# EAGLE board ECE 411 Chronograph Schematic (EAGLE 9.5.1)
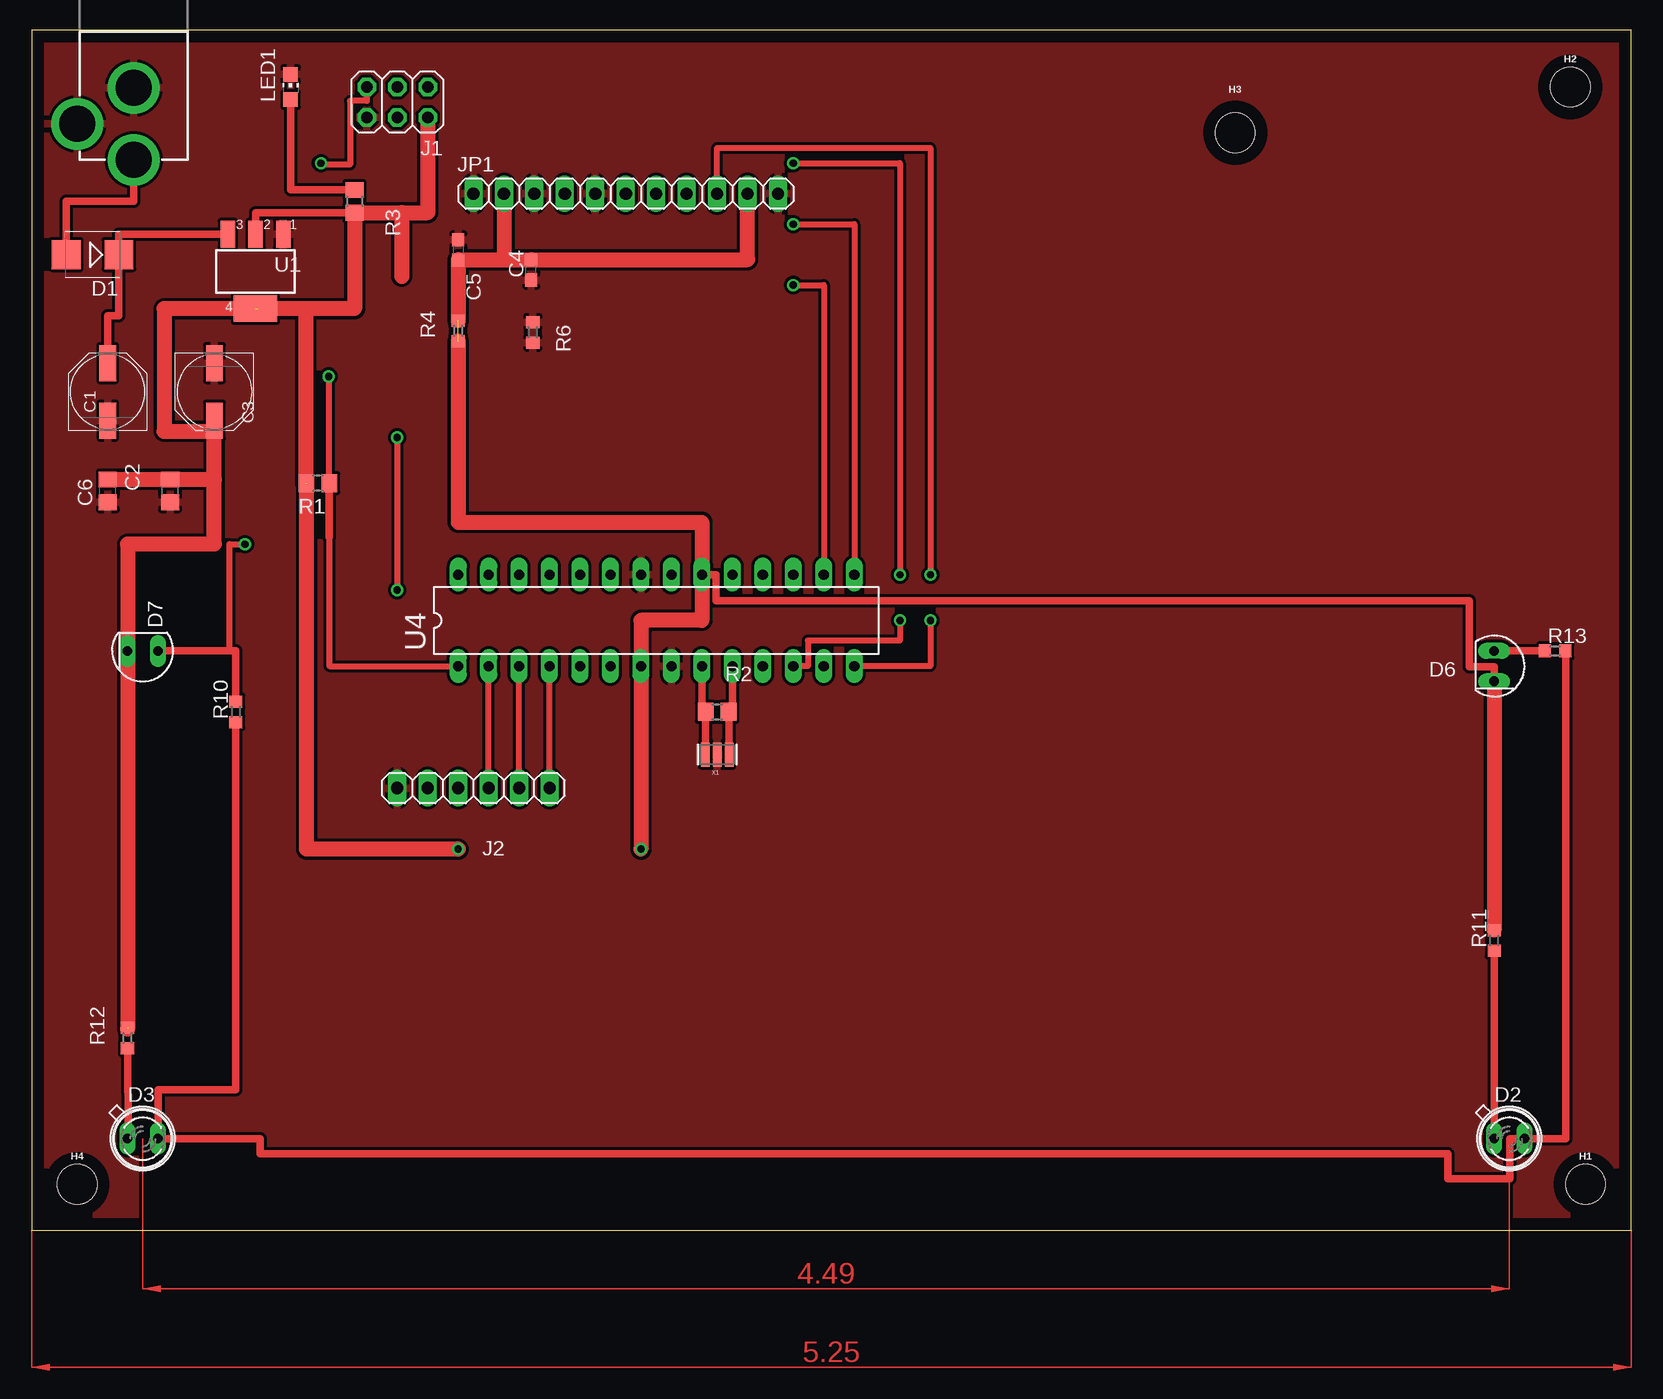
[diagram p0: board, top side]
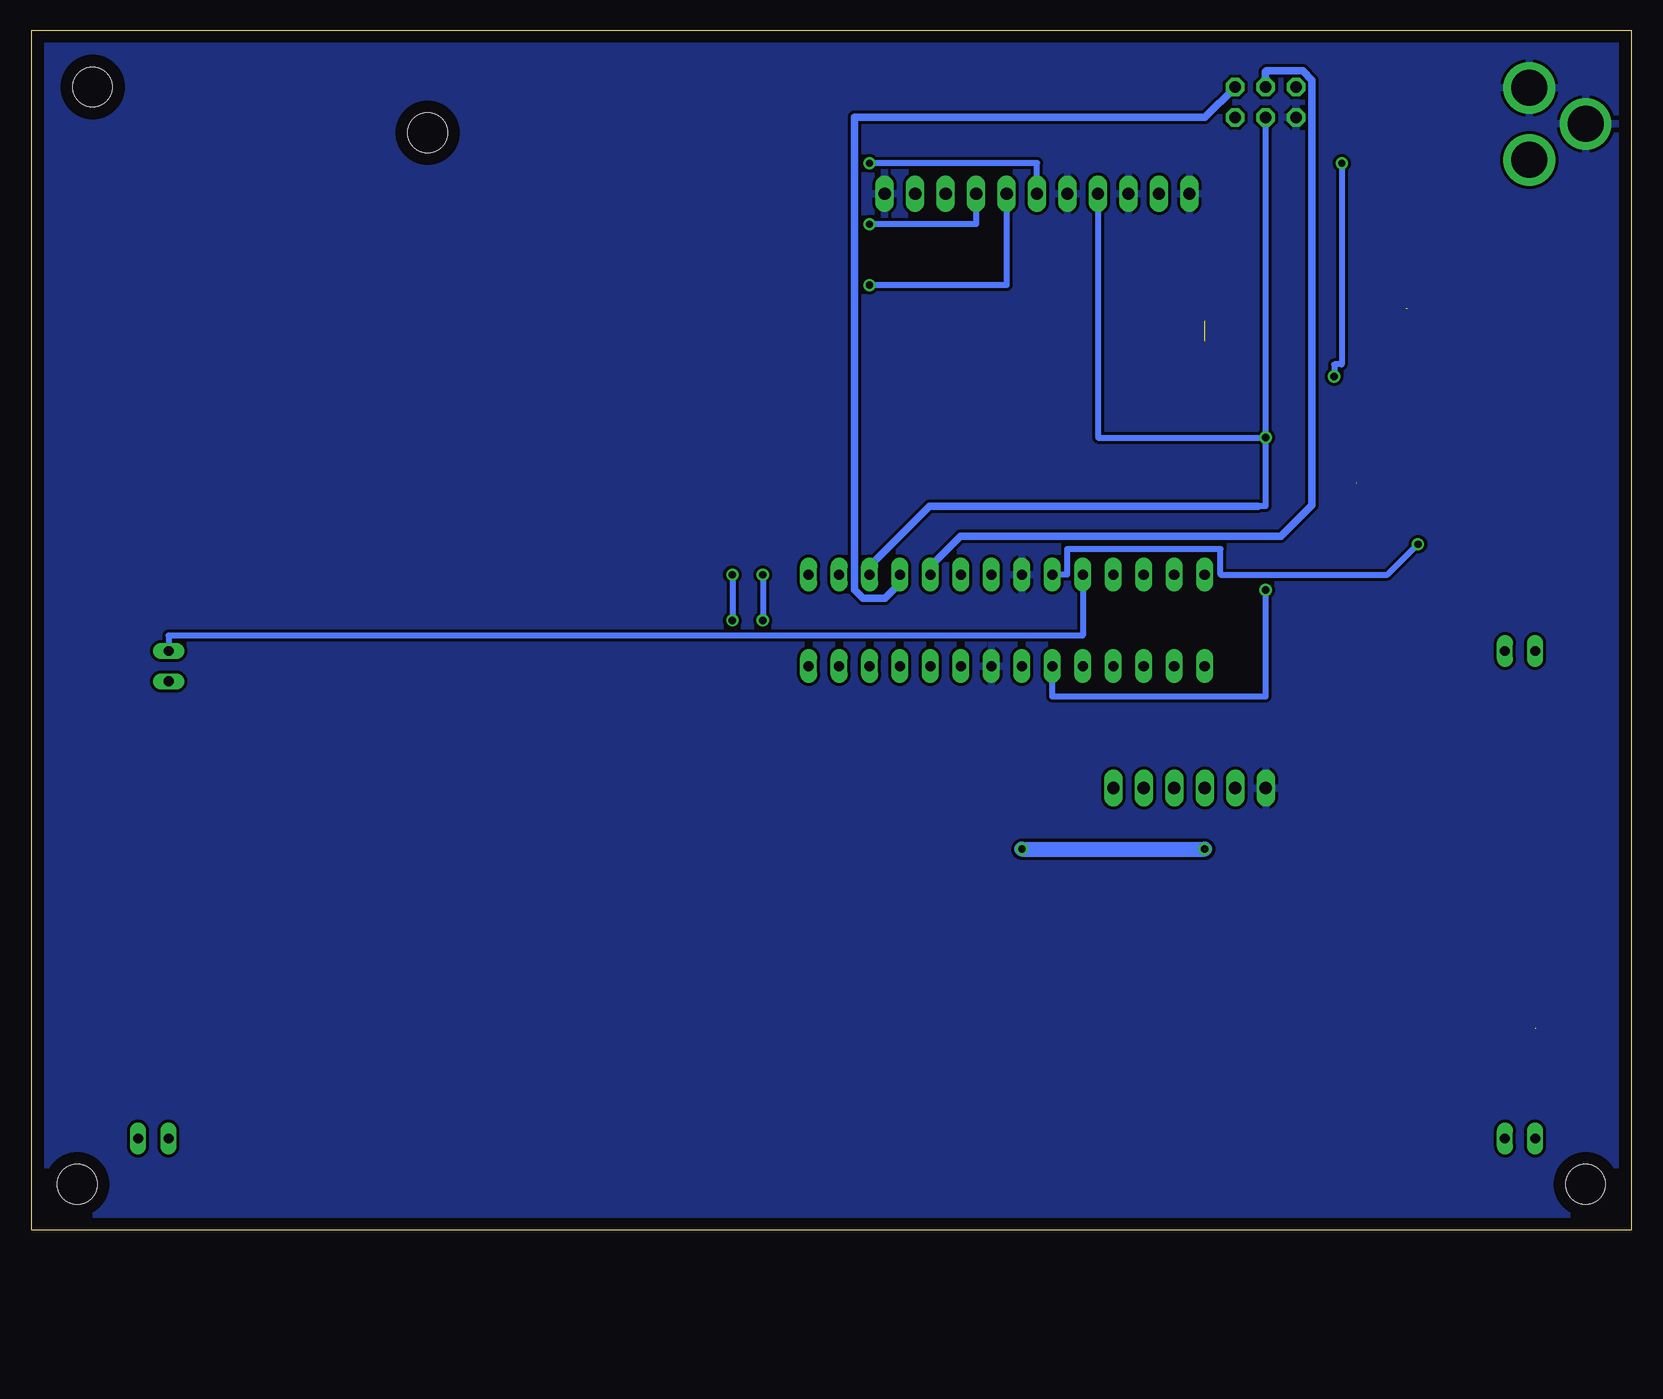
[diagram p1: board, bottom side, seen from below]

Size 133.33 x 100 mm. Coordinates in mm from the lower left corner, seen from the top.
Outline: 0,0 133.33,0 133.33,100 0,100 0,0
Copper layers (1*16): Top 0.035mm / dielectric 1.5mm / Bottom 0.035mm
Design rules "default": minimum track width 6mil, minimum drill 0.35mm, track to track 6mil, track to pad 6mil, pad to pad 6mil, via to via 6mil, smd to smd 6mil, copper to edge 40mil, drill to drill 6mil, minimum pad ring 10mil, minimum via ring 8mil, stop-mask expansion 4mil, vias tented up to drill 0mil, thermal gap 10mil
Net classes: 0 default: width 0.254 mm, clearance 0.254 mm; 1 power: width 0.61 mm, drill 0.61 mm, clearance 0.254 mm; 2 gnd: width 0.305 mm, drill 0.559 mm, clearance 0.254 mm; 3 usbvcc: width 0.508 mm, drill 0.61 mm, clearance 0.254 mm

## Footprints (pad centres in the part's own frame; a part is rotated, then mirrored left to right if it is on the bottom)
PANASONIC_D = smd 3 x 1.4: + 2.4,0; - -2.4,0
C0805 = smd 1.3 x 1.5: 1 -0.95,0; 2 0.95,0
C0603 = smd 1.1 x 1: 1 -0.85,0; 2 0.85,0
SMB = smd 2.4 x 2.4: A 2.2,0; C -2.2,0
SFH482 = drill 0.813 long: A -1.27,0; K 1.27,0
SFH206 = drill 0.813 long: A 0,-1.27; K 0,1.27
STAND-OFF = hole 3.302: 0,0
2X03 = drill 0.95 pad 1.55 octagon: 1 -2.54,-1.27; 2 -2.54,1.27; 3 0,-1.27; 4 0,1.27; 5 2.54,-1.27; 6 2.54,1.27
1X06 = drill 1.016 long: 1 -6.35,0; 2 -3.81,0; 3 -1.27,0; 4 1.27,0; 5 3.81,0; 6 6.35,0
POWER_JACK_PTH = drill 2.997 pad 4.318: GND 0,7.7; GNDBREAK 4.7,10.7; PWR 0,13.7
1X11 = drill 1.016 long: 1 -12.7,0; 2 -10.16,0; 3 -7.62,0; 4 -5.08,0; 5 -2.54,0; 6 0,0; 7 2.54,0; 8 5.08,0; 9 7.62,0; 10 10.16,0; 11 12.7,0
CHIP-LED0805 = smd 1.2 x 1.2: A 0,-1.05; C 0,1.05
R0805 = smd 1.3 x 1.5: 1 -0.95,0; 2 0.95,0
R0603 = smd 1 x 1.1: 1 -0.85,0; 2 0.85,0
SOT223 = smd 1.219 x 2.235: 1 -2.311,-3.099; 2 0,-3.099; 3 2.311,-3.099 | smd 3.6 x 2.2: 4 0,3.099
DIL28-3 = drill 0.85 pad 1.422 long: 1 -16.51,-3.81; 2 -13.97,-3.81; 3 -11.43,-3.81; 4 -8.89,-3.81; 5 -6.35,-3.81; 6 -3.81,-3.81; 7 -1.27,-3.81; 8 1.27,-3.81; 9 3.81,-3.81; 10 6.35,-3.81; 11 8.89,-3.81; 12 11.43,-3.81; 13 13.97,-3.81; 14 16.51,-3.81; 15 16.51,3.81; 16 13.97,3.81; 17 11.43,3.81; 18 8.89,3.81; 19 6.35,3.81; 20 3.81,3.81; 21 1.27,3.81; 22 -1.27,3.81; 23 -3.81,3.81; 24 -6.35,3.81; 25 -8.89,3.81; 26 -11.43,3.81; 27 -13.97,3.81; 28 -16.51,3.81
RESONATOR = smd 0.7 x 2: 1 -1,0; 2 0,0; 3 1,0

## Placement (x,y rotation side)
C1  47u  [PANASONIC_D]  6.35,69.85 90 top
C2  100n  [C0805]  11.56,61.59 90 top
C3  47u  [PANASONIC_D]  15.24,69.85 270 top
C4  100nF  [C0603]  41.66,80.01 90 top
C5  100nF  [C0603]  35.56,81.66 270 top
C6  100n  [C0805]  6.35,61.59 90 top
D1  M7  [SMB]  5.08,81.28 180 top
D2  SFH482  [SFH482]  123.19,7.62 0 top
D3  SFH482  [SFH482]  9.27,7.62 0 top
D6  SFH206  [SFH206]  121.92,46.99 180 top
D7  SFH206  [SFH206]  9.27,48.26 90 top
H1  STAND-OFF  [STAND-OFF]  129.54,3.81 0 top
H2  STAND-OFF  [STAND-OFF]  128.27,95.25 0 top
H3  STAND-OFF  [STAND-OFF]  100.33,91.44 0 top
H4  STAND-OFF  [STAND-OFF]  3.81,3.81 0 top
J1  3x2 M  [2X03]  30.48,93.98 180 top
J2  [1X06]  36.83,36.83 180 top
J4  POWER_JACK  [POWER_JACK_PTH]  8.51,102.87 180 top
JP1  [1X11]  49.53,86.36 0 top
LED1  GREEN  [CHIP-LED0805]  21.59,95.25 0 top
R1  10K  [R0805]  23.88,62.23 180 top
R2  1M  [R0805]  57.15,43.18 0 top
R3  1K  [R0805]  26.92,85.72 270 top
R4  0  [R0603]  35.56,74.93 90 top
R6  1K  [R0603]  41.78,74.8 270 top
R10  10K  [R0603]  17.02,43.18 90 top
R11  100  [R0603]  121.92,24.13 90 top
R12  100  [R0603]  8,16 90 top
R13  10k  [R0603]  127,48.26 0 top
U1  NCP1117ST50T3G  [SOT223]  18.67,79.88 180 top
U4  ATMEGA328P-PU  [DIL28-3]  52.07,50.8 0 top
X1  CSTCE16M0V53-R0 16MHZ  [RESONATOR]  57.15,39.62 180 top

## Library data of the parts
C1-C3 C6 R1-R3 = rcl
C4 C5 = rcl; SPICEPREFIX: C
D1 = diode
D2 D3 LED1 = led
D6 D7 = opto-trans-siemens; MPN: SFH206K; OC_FARNELL: 1212741; OC_NEWARK: 01M8807
H1-H4 = SparkFun-Hardware
J1 U4 X1 = SmartPrj
J2 JP1 = pinhead
J4 = SparkFun-Connectors; PROD_ID: CONN-08197
R4 R6 R10-R13 = rcl; SPICEPREFIX: R
U1 = linear

## Nets
0: D2.K D3.K R10.1 R13.2
+5V [usbvcc]: C2.2 C3.+ C4.2 C5.2 C6.2 D6.K D7.K J1.2 JP1.2 JP1.10 R1.2 R3.2 R4.1 R4.2 R11.2 R12.2 U1.2 U1.4 U4.7 U4.20
D4: JP1.7 U4.16
D5: JP1.8 U4.15
D6: JP1.9 U4.14
GND [gnd]: C1.- C2.1 C3.- C4.1 C5.1 C6.1 J1.6 J2.6 J4.GND J4.GNDBREAK JP1.1 JP1.3 JP1.5 JP1.11 LED1.C R6.1 R6.2 U1.1 U4.8 U4.22 X1.2
IR_PAIR1: D6.A R13.1 U4.24
IR_PAIR2: D7.A R10.2 U4.23
LCD_E: JP1.6 U4.12
MISO: J1.1 U4.18
MOSI: J1.4 U4.17
N$3: LED1.A R3.1
N$4: J2.3 U4.2
N$8: D2.A R11.1
N$9: J2.2 U4.3
N$10: J2.1 U4.4
N$12: D3.A R12.1
PWRIN [power]: D1.A J4.PWR
RESET: J1.5 R1.1 U4.1
RS: JP1.4 U4.6
SCK: J1.3 U4.19
VIN [power]: C1.+ D1.C U1.3
XTAL1: R2.1 U4.9 X1.3
XTAL2: R2.2 U4.10 X1.1

## Tracks (layer width: path | path; a pad name or v marks a point on that pad's centre or on a via)
0
  Top 0.61: R10.1 17.02,11.68 10.54,11.68 D3.K 19.05,7.62 19.05,6.35 118.06,6.35 118.06,4.27 123.24,4.27 123.24,7.62 D2.K 127.89,7.62 127.89,48.22 R13.2
+5V  (via drill 0.61)  (5 unrouted)
  Top 0.508: R4.2 35.82,76.04 | C5.2 35.56,80.86
  Top 0.61: U1.2 18.67,84.78 R3.2 | D6.K 121.92,46.94 119.84,46.94 119.84,52.43 57.05,52.43 57.05,54.61 U4.20
  Top 1.27: 15.24,62.55 15.24,57.15 8,57.15 D7.K 8,16.76 | 15.24,62.55 C3.+ 15.24,66.55 11.05,66.55 11.05,76.78 U1.4 | J1.2 33.02,84.78 30.86,84.78 | 30.86,84.78 R3.2 26.92,76.78 22.86,76.78 | 22.86,76.78 18.8,76.78 | D6.K R11.2 | v50.8,31.75 U4.7 50.8,50.8 55.88,50.8 U4.20 55.88,58.98 35.56,58.98 R4.1 | v35.56,31.75 22.93,31.75 R1.2 | 30.86,84.78 30.86,79.47 | 22.86,76.78 22.86,62.23 | C6.2 C2.2 15.24,62.55 | JP1.10 59.69,80.86 C4.2 39.37,80.86 | 35.56,80.86 39.37,80.86 | C5.2 R4.2 | JP1.2 39.37,80.86
  Bottom 1.27: v50.8,31.75 v35.56,31.75
D4  (via drill 0.61)
  Top 0.508: v63.5,78.74 66.04,78.74 U4.16
  Bottom 0.508: JP1.7 52.07,78.74 v63.5,78.74
D5  (via drill 0.61)
  Top 0.508: U4.15 68.58,83.82 v63.5,83.82
  Bottom 0.508: v63.5,83.82 54.61,83.82 JP1.8
D6  (via drill 0.61)
  Top 0.508: JP1.9 57.15,90.17 74.93,90.17 v74.93,54.61 | v74.93,50.8 74.93,46.99 U4.14
  Bottom 0.508: v74.93,54.61 v74.93,50.8
GND
  pour Top: 0,100.33 133.35,100.33 133.35,0 0,0
  pour Bottom: 0,0 133.35,0 133.35,100.33 0,100.33
IR_PAIR1
  Top 0.61: R13.1 D6.A
  Bottom 0.508: U4.24 45.72,49.53 121.92,49.53 D6.A
IR_PAIR2  (via drill 0.61)
  Top 0.508: 16.51,48.26 16.51,57.15 v17.78,57.15
  Top 0.61: D7.A 16.51,48.26 17.02,48.26 R10.2
  Bottom 0.508: v17.78,57.15 20.32,54.61 34.24,54.61 34.24,56.74 47.04,56.74 47.04,54.61 U4.23
LCD_E  (via drill 0.61)
  Top 0.508: v63.5,88.9 72.39,88.9 v72.39,54.61 | U4.12 64.72,46.99 64.72,49.12 72.39,49.12 v72.39,50.8
  Bottom 0.508: JP1.6 49.53,88.9 v63.5,88.9 | v72.39,54.61 v72.39,50.8
MISO
  Bottom 0.61: U4.18 60.96,53.9 62.23,52.63 64.03,52.63 64.77,53.37 64.77,92.71 35.56,92.71 J1.1
MOSI
  Bottom 0.508: J1.4 30.48,60.33 31.11,60.33
  Bottom 0.61: U4.17 63.5,55.32 58.5,60.33 31.11,60.33
N$3
  Top 0.61: R3.1 21.59,86.67 LED1.A
N$4
  Top 0.508: J2.3 U4.2
N$8
  Top 0.61: R11.1 D2.A
N$9
  Top 0.508: J2.2 U4.3
N$10
  Top 0.508: J2.1 U4.4
N$12
  Top 0.61: R12.1 8.04,7.62 D3.A
PWRIN
  Top 0.61: D1.A 2.88,85.72 8.51,85.72 J4.PWR
RESET  (via drill 0.61)
  Top 0.508: 24.83,57.72 24.83,46.99 U4.1 | J1.5 27.94,94.09 26.55,94.09 26.55,88.77 24.13,88.77 v24.13,88.9 | v24.77,71.12 24.77,62.23 R1.1
  Top 0.61: R1.1 24.83,57.72
  Bottom 0.508: v24.13,88.9 24.13,72.14 24.77,72.14 v24.77,71.12
RS  (via drill 0.61)
  Top 0.508: v30.48,66.04 v30.48,53.34
  Bottom 0.508: JP1.4 44.45,66.04 v30.48,66.04 | U4.6 48.26,44.45 30.48,44.45 v30.48,53.34
SCK
  Bottom 0.508: 30.48,96.52 30.42,96.58
  Bottom 0.61: U4.19 58.42,55.32 55.92,57.82 29.19,57.82 26.61,60.41 26.61,95.8 27.39,96.58 30.42,96.58 | J1.3 30.48,96.52
VIN
  Top 0.61: U1.3 7.28,82.98 D1.C 7.28,76.2 6.35,76.2 C1.+
XTAL1
  Top 0.61: X1.3 56.2,39.62 R2.1 55.88,43.18 U4.9
XTAL2
  Top 0.61: X1.1 58.15,43.18 R2.2 58.42,43.18 U4.10
(copper drawn outside any net)
  shapes: Top area x3